# Altium PCB Arduino DUE.PcbDoc
Units mil, origin at the board's own origin, x right, y up, seen from the top; angles counter-clockwise.
Board outline 7637.8 x 5309.29 mil, 2 copper layers (Top Layer, Bottom Layer), stack 65.792 mil thick; 70 components, 136 nets, 348 pads, 28 vias.
Unrouted connection lines stored in the file: 42.
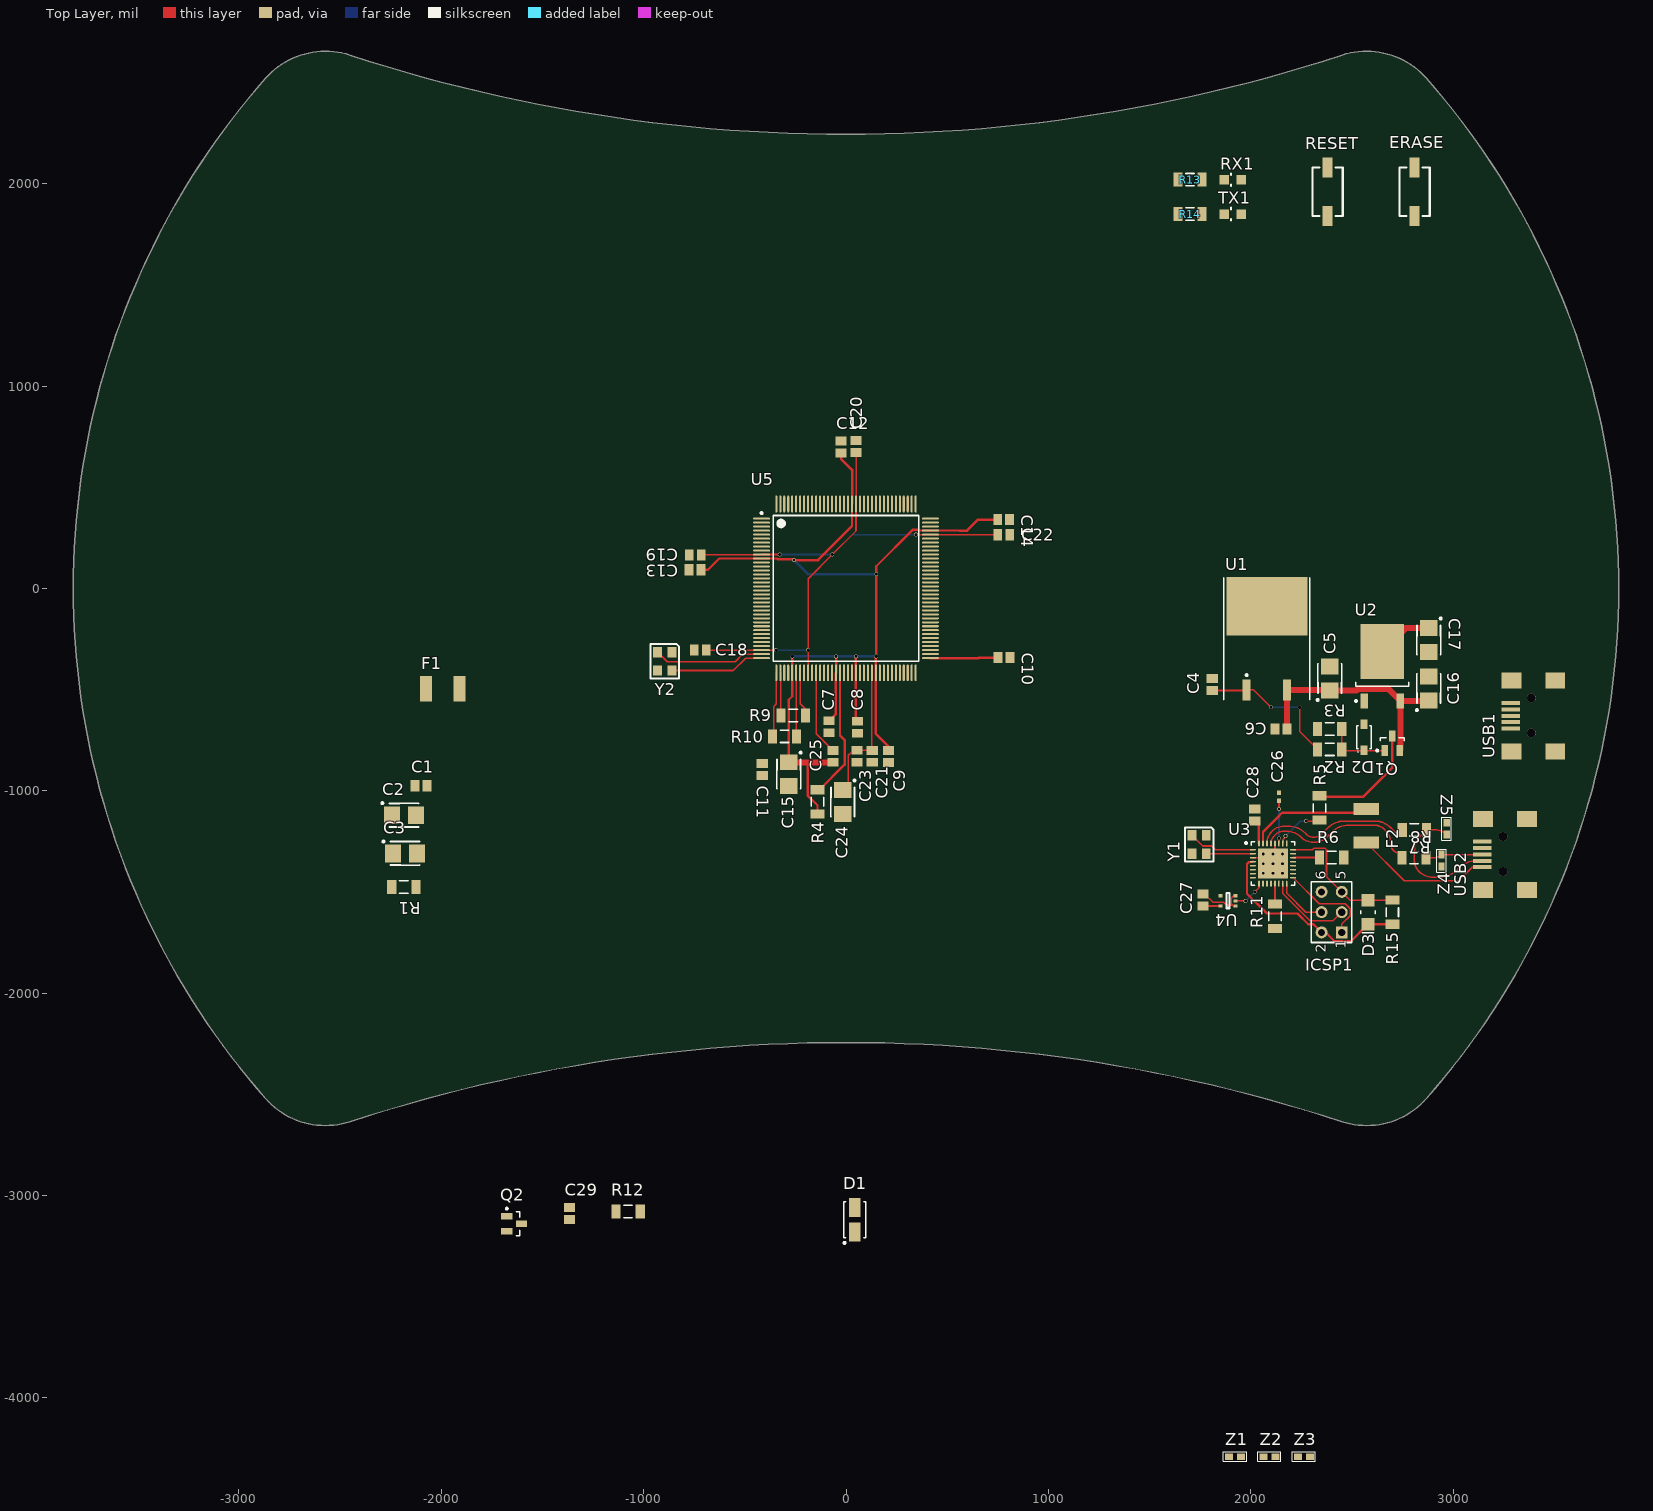
[diagram p0: Top Layer view]
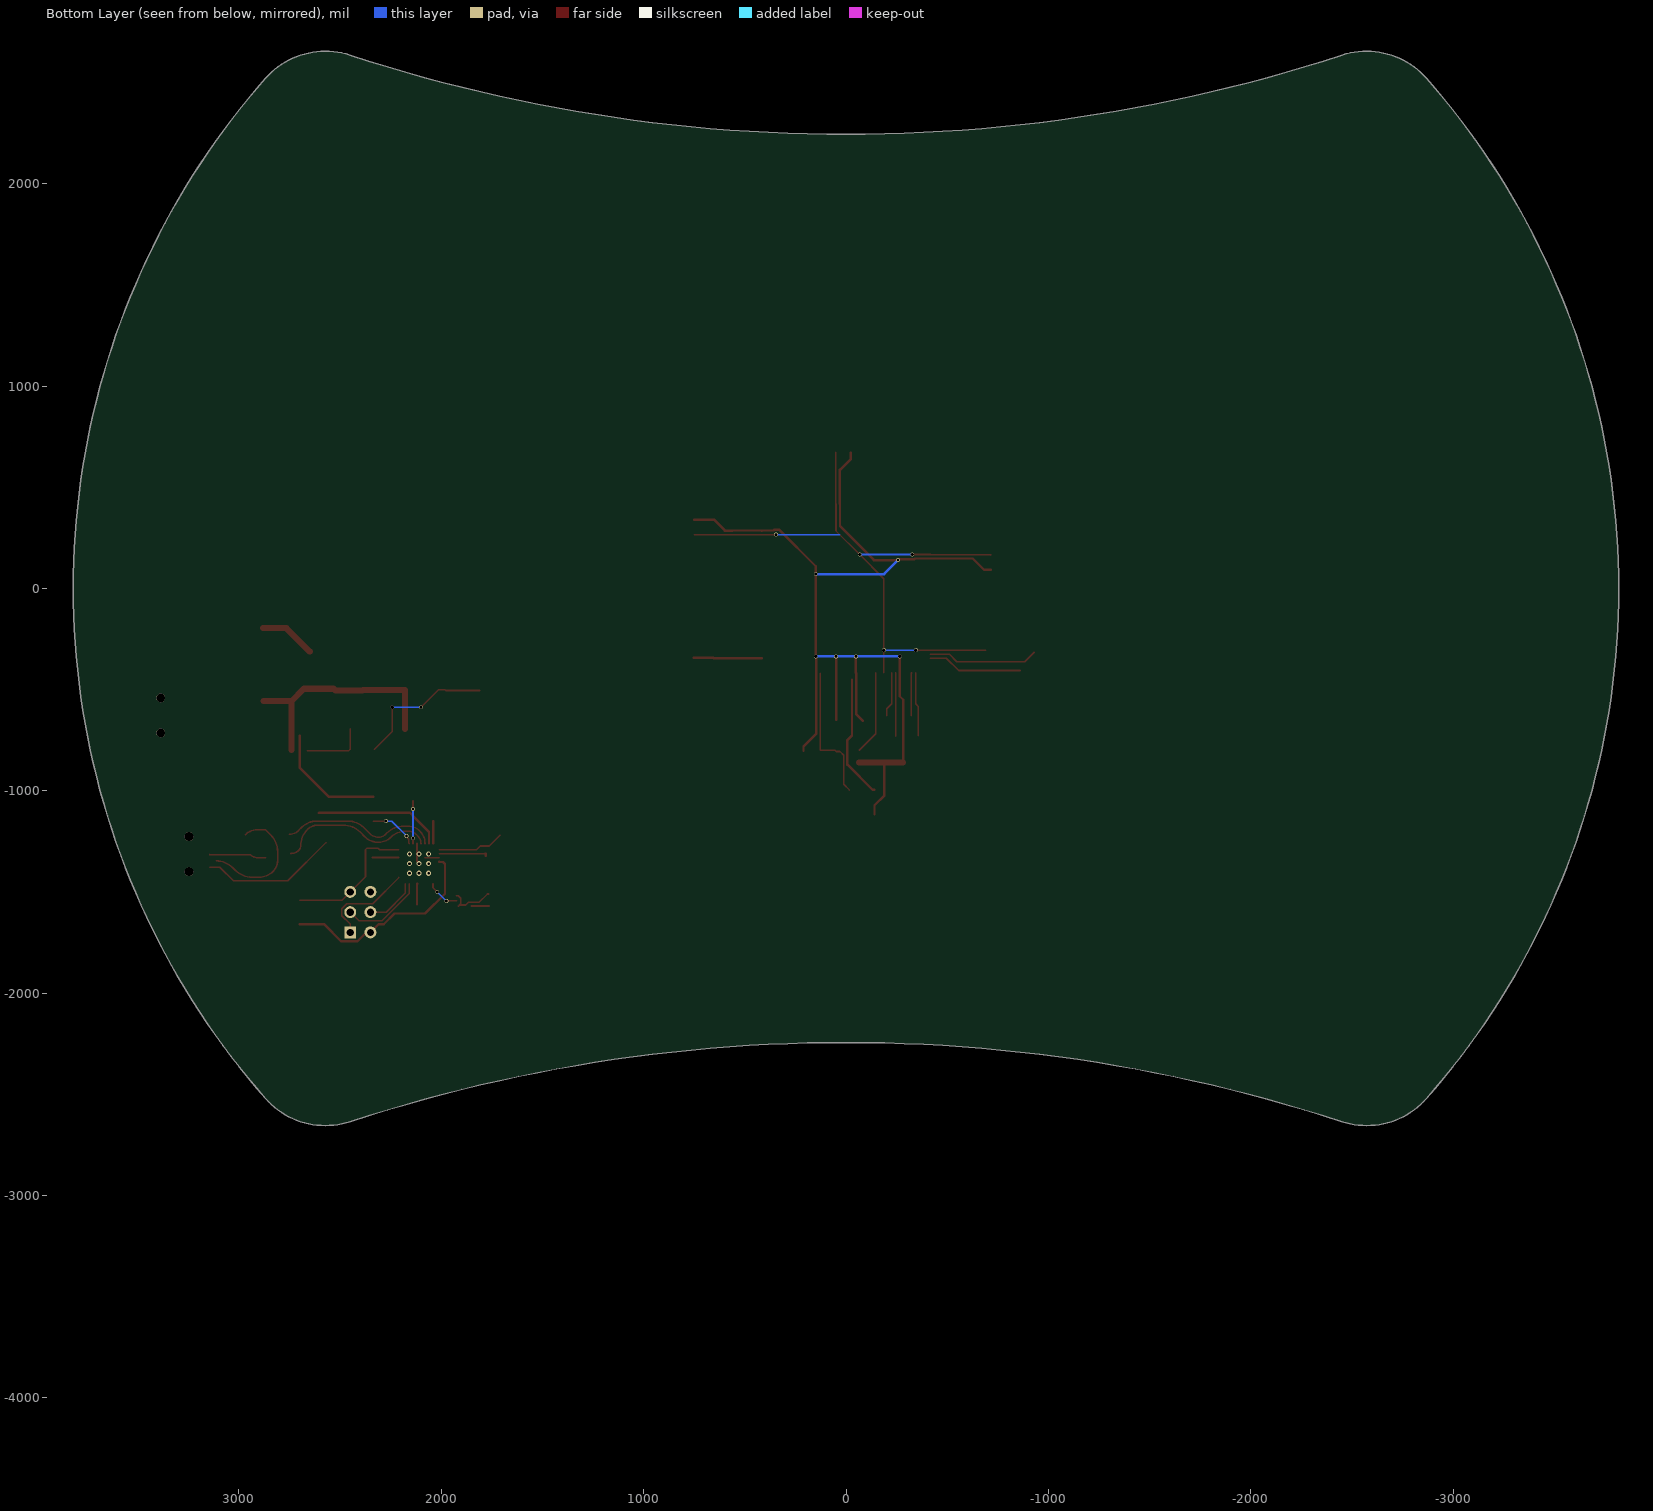
[diagram p1: Bottom Layer view, seen from below]

## Layer stack, top to bottom
Top Layer: signal copper 1.4
Dielectric: core 62.9921, FR-4, Dk 4.8
Bottom Layer: signal copper 1.4

## Board outline
-2868.7,-2520.82 ccw(c-2572.96,-2260.95) -2450.43,-2635.1 cw(c0,-10118.11) 2450.43,-2635.1 ccw(c2572.96,-2260.95) 2868.7,-2520.82 ccw(c0,0) 2868.7,2520.82 ccw(c2572.96,2260.95) 2450.43,2635.1 cw(c0,10118.11) -2450.43,2635.1 ccw(c-2572.96,2260.95) -2868.7,2520.82 ccw(c0,0)

## Design rules (kind name [scope] priority, off if disabled: settings)
Clearance [All] p1: gap=8
HoleSize [All] p1: absolutevalues=TRUE maxlimit=100 minlimit=12 maxpercent=80.000 minpercent=20.000
MinimumSolderMaskSliver [All] p1 off: minsoldermaskwidth=0
PolygonConnect [All] p1: connectstyle=Relief reliefconductorwidth=10 reliefentries=4 polygonreliefangle="90 Angle"
RoutingVias [All] p1: holewidth=16 width=19 viastyle="Through Hole" minholewidth=12 minwidth=16 maxholewidth=16 maxwidth=19
SilkToSilkClearance [All] p1 off: silktosilkclearance=0
SilkscreenOverComponentPads [All] p1: minsilkscreentomaskgap=1
SolderMaskExpansion [All] p1: expansion=4
Width VCC's [(InNet('+3V3') OR InNet('+5V') OR InNet('USBVCC') OR InNet('USBVCCU2'))] p1: maxlimit=30 minlimit=12 preferedwidth=30
Width [All] p2: maxlimit=20 minlimit=8 preferedwidth=8
24 further rules are at their usual default settings.

## Components (designator, comment, footprint, x,y, rotation, side; value= is the part's Value field where it differs from the comment)
C1 "10nF" C0805 -2100,-975 r0 top
C2 "10uF" 3528 -2185,-1120 r0 top
C3 "10uF" 3528 -2180,-1310 r0 top
C4 "100pF" C0805 1810,-475 r90 top
C5 "10uF" 3528 2390,-445 r90 top
C6 "100pF" C0805 2150,-695 r180 top
C7 "100nF" C0805 -84,-684 r270 top
C8 "100nF" C0805 57,-686 r270 top
C9 "100nF" C0805 210,-831 r270 top
C10 "100nF" C0805 781,-342 r0 top
C11 "100nF" C0805 -414,-895 r270 top
C12 "100nF" C0805 -24,699 r90 top
C13 "100nF" C0805 -746,92 r180 top
C14 "100nF" C0805 779,340 r0 top
C15 "10uF" 3528 -283,-918 r270 top
C16 "10uF" 3528 2880,-495 r90 top
C17 "10uF" 3528 2880,-255 r270 top
C18 "100nF" C0805 -720,-305 r180 top
C19 "100nF" C0805 -745,165 r180 top
C20 "100nF" C0805 50,701 r90 top
C21 "100nF" C0805 130,-830 r270 top
C22 "100nF" C0805 780,265 r0 top
C23 "100nF" C0805 55,-829 r270 top
C24 "10uF" 3528 -17,-1055 r270 top
C25 "10nF" C0805 -65,-830 r90 top
C26 "1uF" 0402 2140,-1030 r270 top
C27 "100nF" C0805 1765,-1540 r90 top
C28 "100nF" C0805 2020,-1120 r90 top
C29 "10pF" C0805 -1367,-3089.09 r90 top
D1 "DIODE" DIODESMA 43,-3120 r90 top
D2 "5.1V" DIODE-SOD-123 2560,-735 r90 top
D3 "CD1206-S01575" DIODE1206 2580,-1600 r90 top
ERASE "PUSH BUTTON" "PUSH-BUTTON 5,2X1,6MM" 2810,1840 r90 top
F1 "500mA" MF-MSMF -2075,-495 r0 top
F2 "500mA" MF-MSMF 2570,-1256 r90 top
ICSP1 "Header 3X2" HDR2X3 2450,-1700 r90 top
Q1 "IRLML6402TRPBF" SOT-23 2700,-765 r90 top
Q2 "BSS84P" SOT-23 -1640,-3140 r0 top
R1 "10K" RES1206 -2185,-1475 r180 top
R2 "3.9K" RES1206 2390,-795 r180 top
R3 "100K" RES1206 2390,-695 r0 top
R4 "100K" RES1206 -141,-1055 r270 top
R5 "1K" RES1206 2340,-1085 r90 top
R6 "10K" RES1206 2400,-1330 r0 top
R7 "22R" RES1206 2809,-1193 r180 top
R8 "22R" RES1206 2807,-1331 r180 top
R9 "39R 1%" RES1206 -261,-628 r180 top
R10 "39R 1%" RES1206 -304,-731 r180 top
R11 "10K" RES1206 2120,-1620 r270 top
R12 "6K8 1%" RES1206 -1077,-3079.09 r0 top
R13 "1K" RES1206 1700,2020 r180 top
R14 "1K" RES1206 1700,1850 r180 top
R15 "10K" RES1206 2700,-1600 r270 top
RESET "RESET" "PUSH-BUTTON 5,2X1,6MM" 2380,1840 r90 top
RX1 "YELLOW" LED0805 1870,2020 r0 top
TX1 "YELLOW" LED0805 1870,1850 r0 top
U1 "MC7805CD2T" 936-03 2080,-295 r0 top
U2 "LM1117DTX-3.3" TD03B_N 2650,-385 r90 top
U3 "ATmega16U2-MU" 32PG_N 2110,-1360 r0 top
U4 "74LVC1G125DCK" SC70-5 1925,-1570 r180 top
U5 "ATSAM3X8EA-AU" LQFP144_M 0,0 r0 top
USB1 "USB-MINI-B" USB-MINI-B 3505,-805 r90 top
USB2 "USB-MINI-B" USB-MINI-B 3365,-1490 r90 top
Y1 "12Mhz KX-7" OSC-4-PIN 1710,-1220 r270 top
Y2 "12Mhz KX-7" OSC-4-PIN -931,-315 r270 top
Z1 "ESD" ESD0603 1893,-4290.47 r0 top
Z2 "ESD" ESD0603 2063,-4290.47 r0 top
Z3 "ESD" ESD0603 2233,-4290.47 r0 top
Z4 "ESD" ESD0603 2943,-1375 r90 top
Z5 "ESD" ESD0603 2968,-1158 r270 top

## Footprints (in the part's own frame and the unit in brackets; to place one, negate y for a bottom-side part, rotate by r counter-clockwise, add the part's x,y. Pads: shape width x height; smd on the part's side, far side on the other; paste and mask are expansions set on the pad)
32PG_N [mm] "QFN, 32-Leads, Body 5x5mm, Pitch 0.5mm, IPC Medium Density"
  oval 0.75x0.2 smd: 1(-2.525,1.75) 2(-2.525,1.25) 3(-2.525,0.75) 4(-2.525,0.25) 5(-2.525,-0.25) 6(-2.525,-0.75) 7(-2.525,-1.25) 8(-2.525,-1.75) 17(2.525,-1.75) 18(2.525,-1.25) 19(2.525,-0.75) 20(2.525,-0.25) 21(2.525,0.25) 22(2.525,0.75) 23(2.525,1.25) 24(2.525,1.75)
  oval 0.2x0.75 smd: 9(-1.75,-2.525) 10(-1.25,-2.525) 11(-0.75,-2.525) 12(-0.25,-2.525) 13(0.25,-2.525) 14(0.75,-2.525) 15(1.25,-2.525) 16(1.75,-2.525) 25(1.75,2.525) 26(1.25,2.525) 27(0.75,2.525) 28(0.25,2.525) 29(-0.25,2.525) 30(-0.75,2.525) 31(-1.25,2.525) 32(-1.75,2.525)
  rect 3.8x3.8 smd: 33(0,0)
  silkscreen extent -3.5,-2.73 2.73,2.73, body extent -2.58,-2.58 2.58,2.58, height 1
0402 [mm] "Chip Capacitor, Body 1.0x0.5mm, IPC High Density"
  rect 0.6x0.5 smd: 1(-0.5,0) 2(0.5,0)
  body extent -0.55,-0.3 0.55,0.3, height 1.3
936-03 [mm] "D2-PAK/TO-263-AB; 3 Leads (1 Cropped); Body 14.7 (inc. leads) x 10.2 mm (LxW max)"
  rect 1x2.6 smd: 1(-2.54,-5.25) 3(2.54,-5.25)
  rect 10.2x7.3 smd: 4(0,5.25)
  silkscreen extent -5.4,-6.45 5.4,8.8
3528 [mm] "Capacitor, SM Tantalum; Body 3.5 x 2.8 mm (LxW typ)"
  rect 2x2.2 smd: 1(-1.5,0) 2(1.5,0)
  silkscreen extent -2.82,-1.5 1.85,1.62
C0805 [mm] "Chip Capacitor, Body 2.0x1.3mm, IPC High Density"
  rect 1.1x1.4 smd: 1(-0.75,0) 2(0.75,0)
  body extent -1.1,-0.72 1.1,0.72, height 1.4
DIODE1206 [mm] "Molded Diode, 2-Leads, Body 3,2x1,5mm, IPC Medium Density"
  rect 1.6x1.6 smd: 1(-1.5,0) 2(1.5,0)
  silkscreen extent -2.6,-0.9 0.2,0.9, body extent -1.7,-0.85 1.7,0.85, height 0.95
DIODE-SOD-123 [mm] "Molded Diode, 2-Leads, Body 2,7x1,6mm, IPC Medium Density"
  rect 1.22x0.91 smd: 1(-1.635,0) 2(1.635,0)
  silkscreen extent -1.9,-0.9 1.45,0.9, body extent -1.42,-0.9 1.42,0.9, height 1.35
DIODESMA [mm]
  rect 2.4x1.45 smd: 1(-1.525,0) 2(1.525,0)
  silkscreen extent -3.02,-1.4 2.25,1.4, body extent -2.25,-1.4 2.25,1.4, height 2.3
ESD0603 [mm] "ESD Protection diode"
  rect 1x0.8 smd: 1(0,0) 2(1.5,0)
  silkscreen extent -0.7,-0.6 2.2,0.6, body extent -0.2,-0.5 1.8,0.5, height 0.45
HDR2X3 [mm] "Connector; Header; 3x2 Position"
  rect 1.5x1.5 hole 0.9: 1(0,0)
  round 1.5 hole 0.9: 2(0,2.54) 3(2.54,0) 4(2.54,2.54) 5(5.08,0) 6(5.08,2.54)
  silkscreen extent -1.27,-1.27 6.35,3.81
LED0805 [mm]
  rect 1.2x1.2 smd: 1(0,0) 2(2.1,0)
  silkscreen extent 0.8,-0.8 0.8,0.8, body extent 0,-0.7 2.1,0.7, height 0.8
LQFP144_M [mm] "Thin QFP, 144-Leads, Body 20x20mm, Pitch 0.5mm, IPC Low Density"
  oval 2.1x0.254 smd: 1(-10.6,8.75) 2(-10.6,8.25) 3(-10.6,7.75) 4(-10.6,7.25) 5(-10.6,6.75) 6(-10.6,6.25) 7(-10.6,5.75) 8(-10.6,5.25) 9(-10.6,4.75) 10(-10.6,4.25) 11(-10.6,3.75) 12(-10.6,3.25) 13(-10.6,2.75) 14(-10.6,2.25) 15(-10.6,1.75) 16(-10.6,1.25) 17(-10.6,0.75) 18(-10.6,0.25) 19(-10.6,-0.25) 20(-10.6,-0.75) 21(-10.6,-1.25) 22(-10.6,-1.75) 23(-10.6,-2.25) 24(-10.6,-2.75) 25(-10.6,-3.25) 26(-10.6,-3.75) 27(-10.6,-4.25) 28(-10.6,-4.75) 29(-10.6,-5.25) 30(-10.6,-5.75) 31(-10.6,-6.25) 32(-10.6,-6.75) 33(-10.6,-7.25) 34(-10.6,-7.75) 35(-10.6,-8.25) 36(-10.6,-8.75) 73(10.6,-8.75) 74(10.6,-8.25) 75(10.6,-7.75) 76(10.6,-7.25) 77(10.6,-6.75) 78(10.6,-6.25) 79(10.6,-5.75) 80(10.6,-5.25) 81(10.6,-4.75) 82(10.6,-4.25) 83(10.6,-3.75) 84(10.6,-3.25) 85(10.6,-2.75) 86(10.6,-2.25) 87(10.6,-1.75) 88(10.6,-1.25) 89(10.6,-0.75) 90(10.6,-0.25) 91(10.6,0.25) 92(10.6,0.75) 93(10.6,1.25) 94(10.6,1.75) 95(10.6,2.25) 96(10.6,2.75) 97(10.6,3.25) 98(10.6,3.75) 99(10.6,4.25) 100(10.6,4.75) 101(10.6,5.25) 102(10.6,5.75) 103(10.6,6.25) 104(10.6,6.75) 105(10.6,7.25) 106(10.6,7.75) 107(10.6,8.25) 108(10.6,8.75)
  oval 0.254x2.1 smd: 37(-8.75,-10.6) 38(-8.25,-10.6) 39(-7.75,-10.6) 40(-7.25,-10.6) 41(-6.75,-10.6) 42(-6.25,-10.6) 43(-5.75,-10.6) 44(-5.25,-10.6) 45(-4.75,-10.6) 46(-4.25,-10.6) 47(-3.75,-10.6) 48(-3.25,-10.6) 49(-2.75,-10.6) 50(-2.25,-10.6) 51(-1.75,-10.6) 52(-1.25,-10.6) 53(-0.75,-10.6) 54(-0.25,-10.6) 55(0.25,-10.6) 56(0.75,-10.6) 57(1.25,-10.6) 58(1.75,-10.6) 59(2.25,-10.6) 60(2.75,-10.6) 61(3.25,-10.6) 62(3.75,-10.6) 63(4.25,-10.6) 64(4.75,-10.6) 65(5.25,-10.6) 66(5.75,-10.6) 67(6.25,-10.6) 68(6.75,-10.6) 69(7.25,-10.6) 70(7.75,-10.6) 71(8.25,-10.6) 72(8.75,-10.6) 109(8.75,10.6) 110(8.25,10.6) 111(7.75,10.6) 112(7.25,10.6) 113(6.75,10.6) 114(6.25,10.6) 115(5.75,10.6) 116(5.25,10.6) 117(4.75,10.6) 118(4.25,10.6) 119(3.75,10.6) 120(3.25,10.6) 121(2.75,10.6) 122(2.25,10.6) 123(1.75,10.6) 124(1.25,10.6) 125(0.75,10.6) 126(0.25,10.6) 127(-0.25,10.6) 128(-0.75,10.6) 129(-1.25,10.6) 130(-1.75,10.6) 131(-2.25,10.6) 132(-2.75,10.6) 133(-3.25,10.6) 134(-3.75,10.6) 135(-4.25,10.6) 136(-4.75,10.6) 137(-5.25,10.6) 138(-5.75,10.6) 139(-6.25,10.6) 140(-6.75,10.6) 141(-7.25,10.6) 142(-7.75,10.6) 143(-8.25,10.6) 144(-8.75,10.6)
  silkscreen extent -10.72,-9.15 9.15,9.57, body extent -10,-10 10,10, height 1.6
MF-MSMF [mm] "MF-MSMF Series - PTC Resettable Fuses"
  rect 1.5x3.2 smd: 1(0,0) 2(4.2,0)
  body extent 0,-1.6 4.2,1.6, height 0.8
OSC-4-PIN [mm] "Package of a 4 pin SMD oscilator"
  rect 1.3x1.1 smd: 1(0,0) 2(2.3,0) 3(2.3,1.8) 4(0,1.8)
  silkscreen extent -1,-0.9 3.3,2.7, body extent -1,-0.9 3.3,2.7, height 1.2
"PUSH-BUTTON 5,2X1,6MM" [mil]
  rect 100x50 smd: 1(0,0) 2(240.16,0)
  silkscreen extent 0,-75 240,75, body extent -12,-67 256,67, height 98
RES1206 [mm] "Chip Resistor, 2-Leads, Body 3,1x1,6mm, IPC Medium Density"
  rect 1.15x1.75 smd: 1(-1.525,0) 2(1.525,0)
  silkscreen extent -0.55,-0.77 0.55,0.78, body extent -1.6,-0.8 1.6,0.8, height 0.55
SC70-5 [mm]
  rect 0.5x0.4 smd: 1(0,0) 2(0,-0.65) 3(0,-1.3) 4(1.9,-1.3) 5(1.9,0)
  silkscreen extent 0.76,-1.62 1.14,0.33
SOT-23 [mm] "SOT23, 3-Leads, Body 3,0x2,6mm (max), Pitch 0,95mm, IPC Medium Density"
  rect 1.4x0.8 smd: 1(-0.925,0.95) 2(-0.925,-0.95) 3(0.925,0)
  silkscreen extent -1.05,-1.5 0.7,2.02, body extent -0.7,-1.5 0.7,1.5, height 1.1
TD03B_N [mm] "D-PAK, 4-Leads, Body 6.1x6.6mm, Pitch 2.29mm, Lead Span 9.7mm, IPC Medium Density"
  rect 1.9x0.95 smd: 1(-4.35,2.28) 3(-4.35,-2.28)
  rect 6.9x5.5 smd: 4(1.85,0)
  silkscreen extent -4.47,-3.35 -2,3.43, body extent -2.5,-3.35 3.7,3.35, height 2.38
USB-MINI-B [mm] "USB MINI TYPE B connector"
  round 1.1 hole 1.1 unplated: 0(2.3,3) 0(6.7,3)
  rect 0.5x2.3 smd: 1(6.05,5.6) 2(5.25,5.6) 3(4.45,5.6) 4(3.65,5.6) 5(2.85,5.6)
  oval 0.254x0.6 on Top Overlay: 3(1.8,6.5)
  rect 2x2.5 smd: MH1(0,5.5) MH2(0,0) MH3(8.9,0) MH4(8.9,5.5)
  body extent 0.6,-2.7 8.4,6.5, height 4

## Part data
C1 C2 C3 C4 C5 C6 C7 C8 C9 C10 C11 C12 C13 C14 C15 C16 C17 C18 C19 C20 C21 C22 C23 C24 C25 C27 C28 C29: library part "Cap Pol3", "Polarized Capacitor (Surface Mount)"
C26: library part "Cap Semi", "Capacitor (Semiconductor SIM Model)"
D2: library part ZENER, "ZENER DIODE"
D3: library part DIODE
F1 F2: library part MF-MSMF, "MF-MSMF Series - PTC Resettable Fuses"
ICSP1: "Header, 3-Pin, Dual row"
Q1 Q2: library part MOSFET-P, "P-Channel MOSFET"
R1 R2 R3 R4 R5 R6 R7 R8 R9 R10 R11 R12 R13 R14 R15: library part RES
RESET: library part "PUSH BUTTON"
RX1 TX1: library part LED
U1: "Three-Terminal Positive Voltage Regulator"
U2: "800mA Low-Dropout Linear Regulator, 3-pin TO-252"
U3: "8-bit AVR Microcontroller, 2.7-5.5V, 16KB Flash, 512 Bytes EEPROM, 512 Bytes SRAM, 32-pin VQFN, Industrial Grade (-40°C to 85°C)"
U5: library part ATSAM3X8E, "ATSAM3X8EA-AU ARM CORTEX M3 Microcontroller"
USB1 USB2: "USB Mini type B Horizontal SMD"
Y1 Y2: library part OSC-4-PIN, "KX-7 12MHz Oscilator 20pF"
Z1 Z2 Z3 Z4 Z5: "ESD Protection Diode"

## Via types
v1: diameter 19, hole 16, Top Layer to Bottom Layer, 19 vias
v2: diameter 25.98, hole 12.99, Top Layer to Bottom Layer, tented top, 9 vias

## Nets (pads, with @x,y where several pads share a name; then routed paths per layer and width w, separated by ;. In a path a pad name is that pad's centre, name@x,y a point inside that pad or via, vN(x,y) a via of type N, cw(c..) or ccw(c..) an arc to the next point about the centre after c; other vN are vias at no path point)
+3V3: C7.1 C8.1 C9.1 C10.1 C11.1 C12.1 C13.1 C14.1 C15.1 C17.1 C25.1 C27.1 ERASE.2 Q2.2 R4.2 U2.4 U4.5 U5.11 U5.41 U5.52 U5.57 U5.62 U5.73 U5.105 U5.125 | length 6078
  Top Layer w12: C13.1 -682,92 -626.36,147.64 U5.11 -341.23,147.64 -337.41,143.82 -260.82,143.82 v1(-257,140) -138,140 29.53,307.53 U5.125 30.21,418.01 30.21,461.53 30,461.74 30,586 -24,640 C12.1 ; C15.1 -283,-550 -265.75,-532.75 U5.41 v1(-265.75,-335.75) ; -189,-859.53 -189,-957.87 -189.45,-958.32 -189.45,-1023.4 -141,-1071.85 R4.2 ; C7.1 -49.9,-620.37 -49.9,-418.01 U5.52 v1(-49.21,-335.79) ; C8.1@49.21,-648.68 U5.57 v1(49.21,-335.79) ; v1@147.64,-337.36 U5.62 147.64,-719.64 210,-782 C9.1 ; v1(149.25,-335.75) v1(149.25,71) 149.25,109.25 329.25,289.25 355.48,289.25 358.61,286.12 416.64,286.12 U5.105 417.89,286 562.46,286 563.02,285.43 598.43,285.43 653,340 C14.1 ; U5.73 654.51,-344.49 657,-342 C10.1 ; C27.1 U4.5@1849.72,-1569.53
  Top Layer w30: C15.1@-282.42,-859.53 -189,-859.53 C25.1 ; U2.4 2766.22,-195.95 C17.1
  Bottom Layer w12: v1(-265.75,-335.75) v1(149.25,-335.75) ; v1(-257,140) -188,71 v1(149.25,71)
+5V: C5.1 C6.1 C16.1 C28.1 D3.1 ICSP1.2 Q1.2 R13.2 R14.2 R15.2 U1.3 U2.3 U3.4 U3.32 | length 2303.4
  Top Layer w12: U3.4 2008.84,-1351.91 1992.33,-1351.91 1981.83,-1362.41 1981.83,-1508.67 2079.75,-1606.6 2231.14,-1606.6 2284.07,-1659.53 2309.53,-1659.53 ICSP1.2 2371.15,-1700 2414.67,-1743.53 2495.53,-1743.53 D3.1 2580.98,-1660.04 R15.2 ; U3.32@2040,-1259.49 C28.1@2040,-1149.53 ; C6.1 C6.1@2180,-694.53 ; U2.3@2737.4,-556.26 U2.3
  Top Layer w30: C6.1@2180,-694.53 U1.3 C5.1@2387.64,-501.69 ; C5.1 2523.81,-504.05 2532.01,-495.86 2679.36,-495.86 U2.3 ; Q1.2@2739.76,-799.06 U2.3 ; C16.1@2877.79,-556.26 U2.3
AD0: U5.78
AD1: U5.79
AD2: U5.80
AD3: U5.81
AD4: U5.82
AD5: U5.83
AD6: U5.84
AD7: U5.85
AD8: U5.88
AD9: U5.89
AD10: U5.90
AD11(TXD3): U5.91
AD14(RXD3): U5.92
BD+: R8.1 USB2.3@3144.53,-1314.8 Z4.2 | length 281.8
  Top Layer w8: R8.1 2906.65,-1331 ccw(c2906.65,-1279.59) Z4.2 3141.77,-1315.94 ccw(c3141.77,-1312.05) USB2.3@3144.53,-1314.8
BD-: R7.1 USB2.4 Z5.2 | length 649.1
  Top Layer w8: Z5.2 ccw(c2909.93,-1275.13) 2909.93,-1193 R7.1 2842.98,-1219.07 ccw(c2925,-1301.09) 2809,-1301.09 2809,-1344.89 ccw(c2884.11,-1344.89) 2831,-1398 ccw(c2901.01,-1327.99) 2901.01,-1427 2935.95,-1427 ccw(c2935.95,-1311) 3017.98,-1393.02 3030.73,-1380.27 cw(c3112.75,-1462.3) USB2.4@3112.75,-1346.3
CANRX0: U5.24
CANTX0: U5.23
CANTX1/IO: U5.140
D+: R10.2 U5.37 USB1.3@3284.53,-629.8 Z2.2 | length 317.1
  Top Layer w8: R10.2@-357.6,-729 -357.6,-583.55 -344.49,-570.44 U5.37
D-: R9.2 U5.38 USB1.4 Z3.2 | length 213.4
  Top Layer w8: U5.38 -322.96,-419.17 R9.2@-322.96,-630
DAC0(CANRX1): U5.76
DAC1: U5.77
EEXTINT: U5.25
EMDC: U5.123
EMDIO: U5.127
ERASE_CMD: Q2.1 U3.23
ERX_DV: U5.119
ERX_ER: U5.122
ERXD0: U5.120
ERXD1: U5.121
ETX_CLK: U5.113
ETX_EN: U5.114
ETXD0: U5.115
ETXD1: U5.118
GND: C1.2 C2.2 C3.2 C4.2 C5.2 C6.2 C7.2 C8.2 C9.2 C10.2 C11.2 C12.2 C13.2 C14.2 C15.2 C16.2 C17.2 C18.2 C19.2 C20.2 C21.2 C22.2 C23.2 C24.2 C26.1 C27.2 C28.2 C29.2 D2.2 ICSP1.6 R1.1 R3.1 R11.2 R12.1 RESET.2 U1.4 U2.1 U3.3 U3.28 U3.33 U4.1 U4.3 U5.12 U5.33 U5.44 U5.46 U5.54 U5.58 U5.74 U5.106 U5.126 USB1.1 USB1.MH1 USB1.MH2 USB1.MH3 USB1.MH4 USB2.1 USB2.MH1 USB2.MH2 USB2.MH3 USB2.MH4 Y1.2 Y1.4 Y2.2 Y2.4 Z1.1 Z2.1 Z3.1 Z4.1 Z5.1 | length 397.8
  Top Layer w8: C27.2 1772.13,-1510.47 1811.78,-1550.13 1865.01,-1550.13 1879.17,-1564.28 1910.19,-1564.28 ; U4.1@1915.91,-1570 1910.19,-1564.28 ; U4.3 1915.9,-1518.82 1903.16,-1531.56 1903.16,-1557.25 1910.19,-1564.28 ; U3.3 U3.33@2080.47,-1330.47 ; U3.33@2119.84,-1350.16 U3.28
  other v2: 2062.76,-1407.24 2110,-1407.24 2157.24,-1407.24 2062.76,-1360 2110,-1360 2157.24,-1360 2062.76,-1312.76 2110,-1312.76 2157.24,-1312.76
JTAG_TCK: U5.28
JTAG_TDI: U5.29
JTAG_TDO: U5.30
JTAG_TMS: U5.31
MASTER-RESET: C25.2 R6.2 RESET.1 U5.47 | length 417.4
  Top Layer w8: U5.47 -147.64,-717.83 C25.2
MISO: U5.108
MOSI: U5.109
NetC4_1: C4.1 D1.1 R2.2 U1.1 | length 712.9
  Top Layer w8: C4.1 1977.17,-504.53 U1.1 2014.69,-501.69 v1(2100,-587) ; v1(2242,-587) 2242,-707.04 R2.2
  Bottom Layer w8: v1(2100,-587) v1(2242,-587)
NetC26_2: C26.2 U3.27 | length 220.5
  Top Layer w8: U3.27 2139.53,-1230.47 2140,-1230.94 v1(2140,-1235) ; v1(2139.53,-1090.47) 2140,-1090 C26.2
  Bottom Layer w8: v1(2139.53,-1090.47) 2139.53,-1234.53 v1(2140,-1235)
NetC29_1: C29.1 R12.2 U5.40
NetD1_2: D1.2
NetD2_1: D2.1 Q1.1 R2.1 R3.2 | length 315.2
  Top Layer w8: R3.2 R2.1 2456.46,-801.42 Q1.1
NetERASE_1: ERASE.1 Q2.3 U5.130
NetF2_1: F2.1 USB2.5 | length 680.7
  Top Layer w8: F2.1 2759,-1445 3027,-1445 3094.2,-1377.8 USB2.5
NetICSP1_1: ICSP1.1 U3.17 | length 480.3
  Top Layer w8: U3.17 2338.98,-1558.47 2467.2,-1558.47 2491.53,-1582.8 2491.53,-1617.2 2450,-1658.73 ICSP1.1
NetICSP1_3: ICSP1.3 U3.15 | length 412.6
  Top Layer w8: U3.15 2159.21,-1509.21 2291.53,-1641.53 2408.47,-1641.53 ICSP1.3
NetICSP1_4: ICSP1.4 U3.16 | length 256.8
  Top Layer w8: U3.16 2178.9,-1506.27 2272.63,-1600 ICSP1.4
NetR4_1: R4.1 U5.53 | length 614.7
  Top Layer w12: R4.1 -130.96,-994.96 -7,-871 -7,-749 -29.53,-726.47 U5.53@-29.53,-451
NetR5_1: R5.1 U3.26 | length 236.2
  Top Layer w8: U3.26 2161.5,-1258.3 2161.5,-1238.91 2172,-1228.41 v1(2172,-1223) ; v1(2274,-1150) v1(2274,-1150) R5.1@2335.04,-1150
  Bottom Layer w8: v1(2172,-1223) 2245,-1150 v1(2274,-1150)
NetR6_1: R6.1 U3.22 | length 130.7
  Top Layer w8: U3.22 2209.88,-1330 R6.1
NetR7_2: R7.2 U3.30 | length 780.2
  Top Layer w8: U3.30 2080.47,-1259.22 cw(c2164.22,-1259.22) 2105,-1200 2105.25,-1199.75 cw(c2165,-1259.5) 2165,-1175 2186.95,-1175 cw(c2186.95,-1291) 2268.98,-1208.98 2275.86,-1215.86 ccw(c2310,-1181.72) 2310,-1230 ccw(c2310,-1169.64) 2352.68,-1212.32 2383.18,-1181.82 cw(c2460,-1258.64) 2460,-1150 2616.57,-1150 cw(c2616.57,-1252.43) 2689,-1180 2705.64,-1196.64 ccw(c2749.96,-1152.33) R7.2@2749.96,-1215
NetR8_2: R8.2 U3.29 | length 798
  Top Layer w8: U3.29 cw(c2150.25,-1260.59) 2114.83,-1225.17 2118.03,-1221.97 2118.03,-1221.57 2125.17,-1214.43 cw(c2160,-1249.26) 2160,-1200 2177.57,-1200 cw(c2177.57,-1302.43) 2250,-1230 ccw(c2310.36,-1169.64) 2310.36,-1255 ccw(c2310.36,-1159.29) 2378.03,-1226.97 2401.02,-1203.98 cw(c2483.05,-1286) 2483.05,-1170 2609.64,-1170 cw(c2609.64,-1243.28) 2661.46,-1191.46 cw(c2580.5,-1272.43) 2695,-1272.43 ccw(c2725.36,-1272.43) 2703.89,-1293.89 ccw(c2742.78,-1255) R8.2@2742.78,-1310
NetR9_1: R9.1 U5.43 | length 221.2
  Top Layer w8: U5.43 -226.38,-569.62 -200.96,-595.04 R9.1
NetR10_1: R10.1 U5.42 | length 313.2
  Top Layer w8: U5.42 -246,-417.39 -246,-538.46 -246.06,-538.52 -246.06,-728.9 R10.1@-244.96,-730
NetR11_1: R11.1 U3.13 | length 100.6
  Top Layer w12: U3.13 2120,-1459.57 R11.1
NetR13_1: R13.1 RX1.1
NetR14_1: R14.1 TX1.1
NetRX1_2: RX1.2 U3.10
NetTX1_2: TX1.2 U3.11
NetU3_1: U3.1 Y1.1 | length 330
  Top Layer w8: Y1.1 1762.96,-1272.96 1807.49,-1272.96 1825.63,-1291.1 U3.1
NetU3_2: U3.2 Y1.3 | length 241.2
  Top Layer w8: Y1.3@1780.79,-1310.79 U3.2
  Top Layer w12: Y1.3@1780,-1320.31 1780,-1310 Y1.3@1780.79,-1310.79
NetU3_9: U3.9 U4.2 | length 162.4
  Top Layer w8: U4.2 v1@1974.41,-1544.41 ; v1(2020,-1500) 2041.1,-1478.9 U3.9
  Bottom Layer w8: v1(1975,-1545) v1(2020,-1500)
NetU5_35: U5.35 Y2.1 | length 548.6
  Top Layer w8: Y2.1 -884,-362 -548,-362 -511,-325 -417.52,-325 U5.35
NetU5_36: U5.36 Y2.3 | length 468.1
  Top Layer w8: Y2.3 -556.55,-405.55 -495.49,-344.49 U5.36
PIN22: U5.1
PIN23: U5.7
PIN24: U5.8
PIN25: U5.13
PIN26: U5.14
PIN27: U5.15
PIN28: U5.16
PIN29: U5.19
PIN30: U5.22
PIN31: U5.26
PIN32: U5.32
PIN33: U5.55
PIN34: U5.59
PIN35: U5.60
PIN36: U5.116
PIN37: U5.63
PIN38: U5.64
PIN39: U5.65
PIN40: U5.66
PIN41: U5.67
PIN42: U5.71
PIN43: U5.72
PIN44: U5.101
PIN45: U5.100
PIN46: U5.99
PIN47: U5.98
PIN48: U5.97
PIN49: U5.96
PIN50: U5.95
PIN51: U5.94
PWM2: U5.144
PWM3: U5.139
PWM5: U5.136
PWM6: U5.135
PWM7: U5.134
PWM8: U5.133
PWM9: U5.132
PWM11: U5.20
PWM12: U5.21
PWM13: U5.68
RESET2: D3.2 ICSP1.5 R15.1 U3.24 | length 677.9
  Top Layer w8: U3.24 2304.8,-1291.1 2312.35,-1283.55 2367.57,-1283.55 2374.6,-1290.58 2374.6,-1424.6 ICSP1.5 2490.95,-1540.95 D3.2 R15.1@2699.01,-1540.95
RX: U4.4 U5.27
RXD0: U5.18
RXD1: U5.5
RXD2: U5.3
RXL: U5.103
SCL0-3: U5.87
SCL1: U5.70
SDA0-3: U5.86
SDA1: U5.9
SPCK: U5.110
SS0/PWM10: U5.102 U5.111
SS1/PWM4: U5.112 U5.137
SS3: U5.142
TX: U3.8 U5.2
TXD0: U5.17
TXD1: U5.6
TXD2: U5.4
TXL: U5.107
UOTGID: U5.129 USB1.2 Z1.2
UOTGVBOF: U5.128
USBVCC: C2.1 C3.1 F1.2 Q1.3 R1.2 R5.2 | length 581.5
  Top Layer w12: R5.2@2335,-1029.96 2555.04,-1029.96 2700,-885 Q1.3
USBVCCU2: F2.2 U3.31 | length 642
  Top Layer w12: U3.31 2060.79,-1203.21 2140,-1124 2140,-1123.23 2154.83,-1108.4 2603.4,-1108.4 F2.2@2605,-1110
VDDOUT: C18.1 C19.1 C20.1 C21.1 C22.1 C23.1 C24.1 U5.10 U5.34 U5.45 U5.56 U5.61 U5.104 U5.124 | length 3746.5
  Top Layer w8: C19.1 -714.83,165.64 U5.10@-419.01,165.64 ; C18.1 -417.44,-305 U5.34 v1(-345.12,-305.12) ; U5.10 v1(-327.68,167.32) ; U5.45 -187.01,47.99 v1(-67.68,167.32) 49.21,284.21 U5.124 ; C24.1 11,-967.94 11,-825 30,-806 48.47,-806 54,-800.47 128,-800.47 U5.61@128,-419.37 ; U5.124@50,418.11 C20.1 ; v1(345.75,265.75) U5.104 418.07,265 C22.1
  Bottom Layer w8: v1(-345.12,-305.12) v1(-187.13,-305.12) ; v1(-327.68,167.32) v1(-67.68,167.32) ; 30.75,265.75 v1(345.75,265.75)
XUSB: C1.1 F1.1 U5.39 USB1.5
pads on no net: U3.5 U3.6 U3.7 U3.12 U3.14 U3.18 U3.19 U3.20 U3.21 U3.25 U5.48 U5.49 U5.50 U5.51 U5.69 U5.75 U5.93 U5.117 U5.131 U5.138 U5.141 U5.143 USB1.0 USB1.3@3249.09,-734.13 USB2.0 USB2.2 USB2.3@3109.09,-1419.13

## Silkscreen, mask and mechanical layers (free items; w line width, h text height)
Mechanical 1:
  the board outline again, w5

## Text inside footprints (layer, text, board x,y; h text height)
ICSP1: Top Overlay "1" at 2470,-1780 h50 r90; Top Overlay "2" at 2370,-1800 h50 r90; Top Overlay "5" at 2470,-1440 h50 r90; Top Overlay "6" at 2370,-1440 h50 r90